# EAGLE board plus10_fromScratchOtherMill (EAGLE 9.0.1)
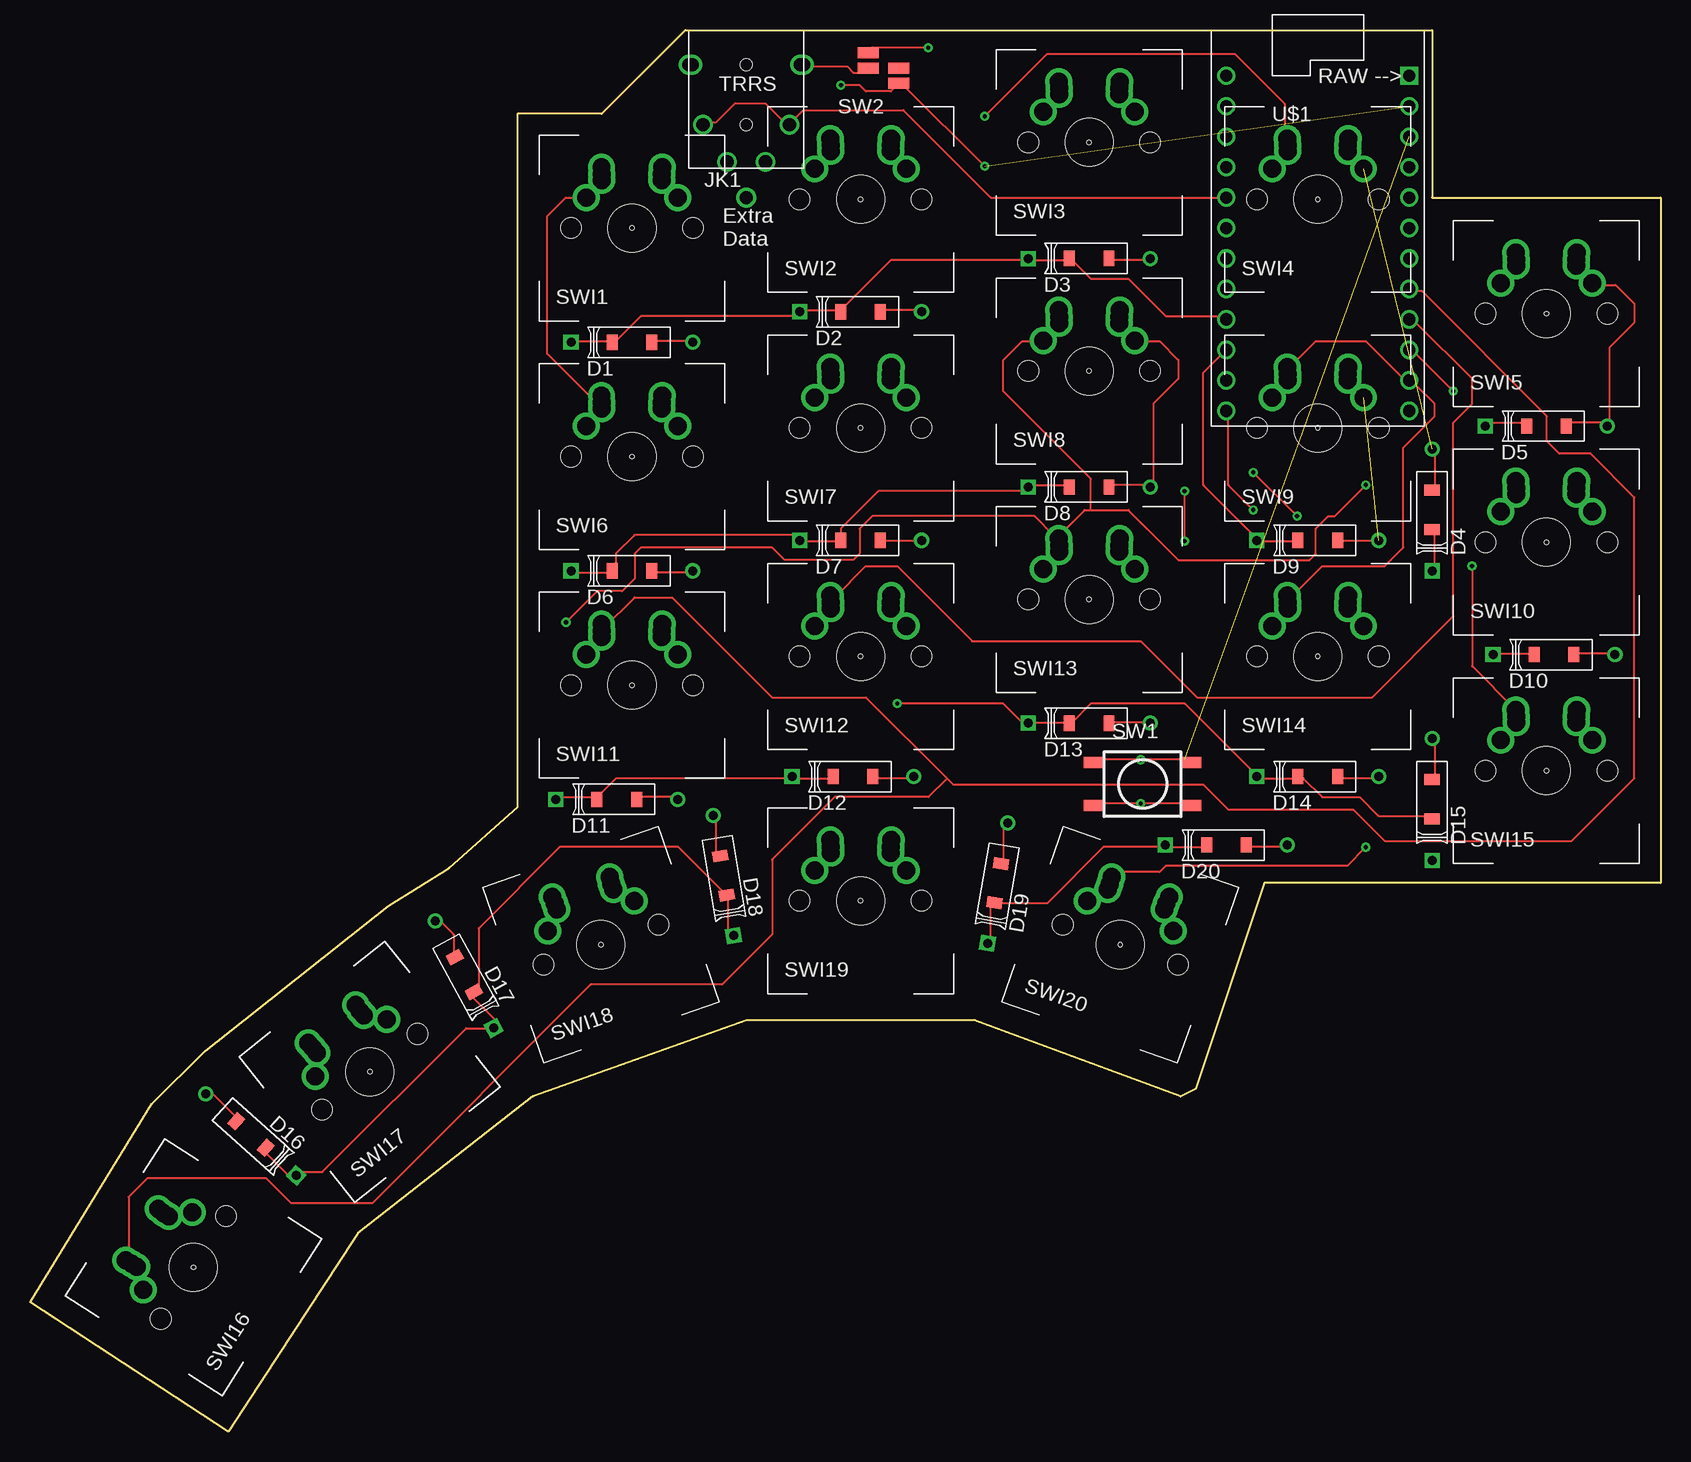
[diagram p0: board, top side]
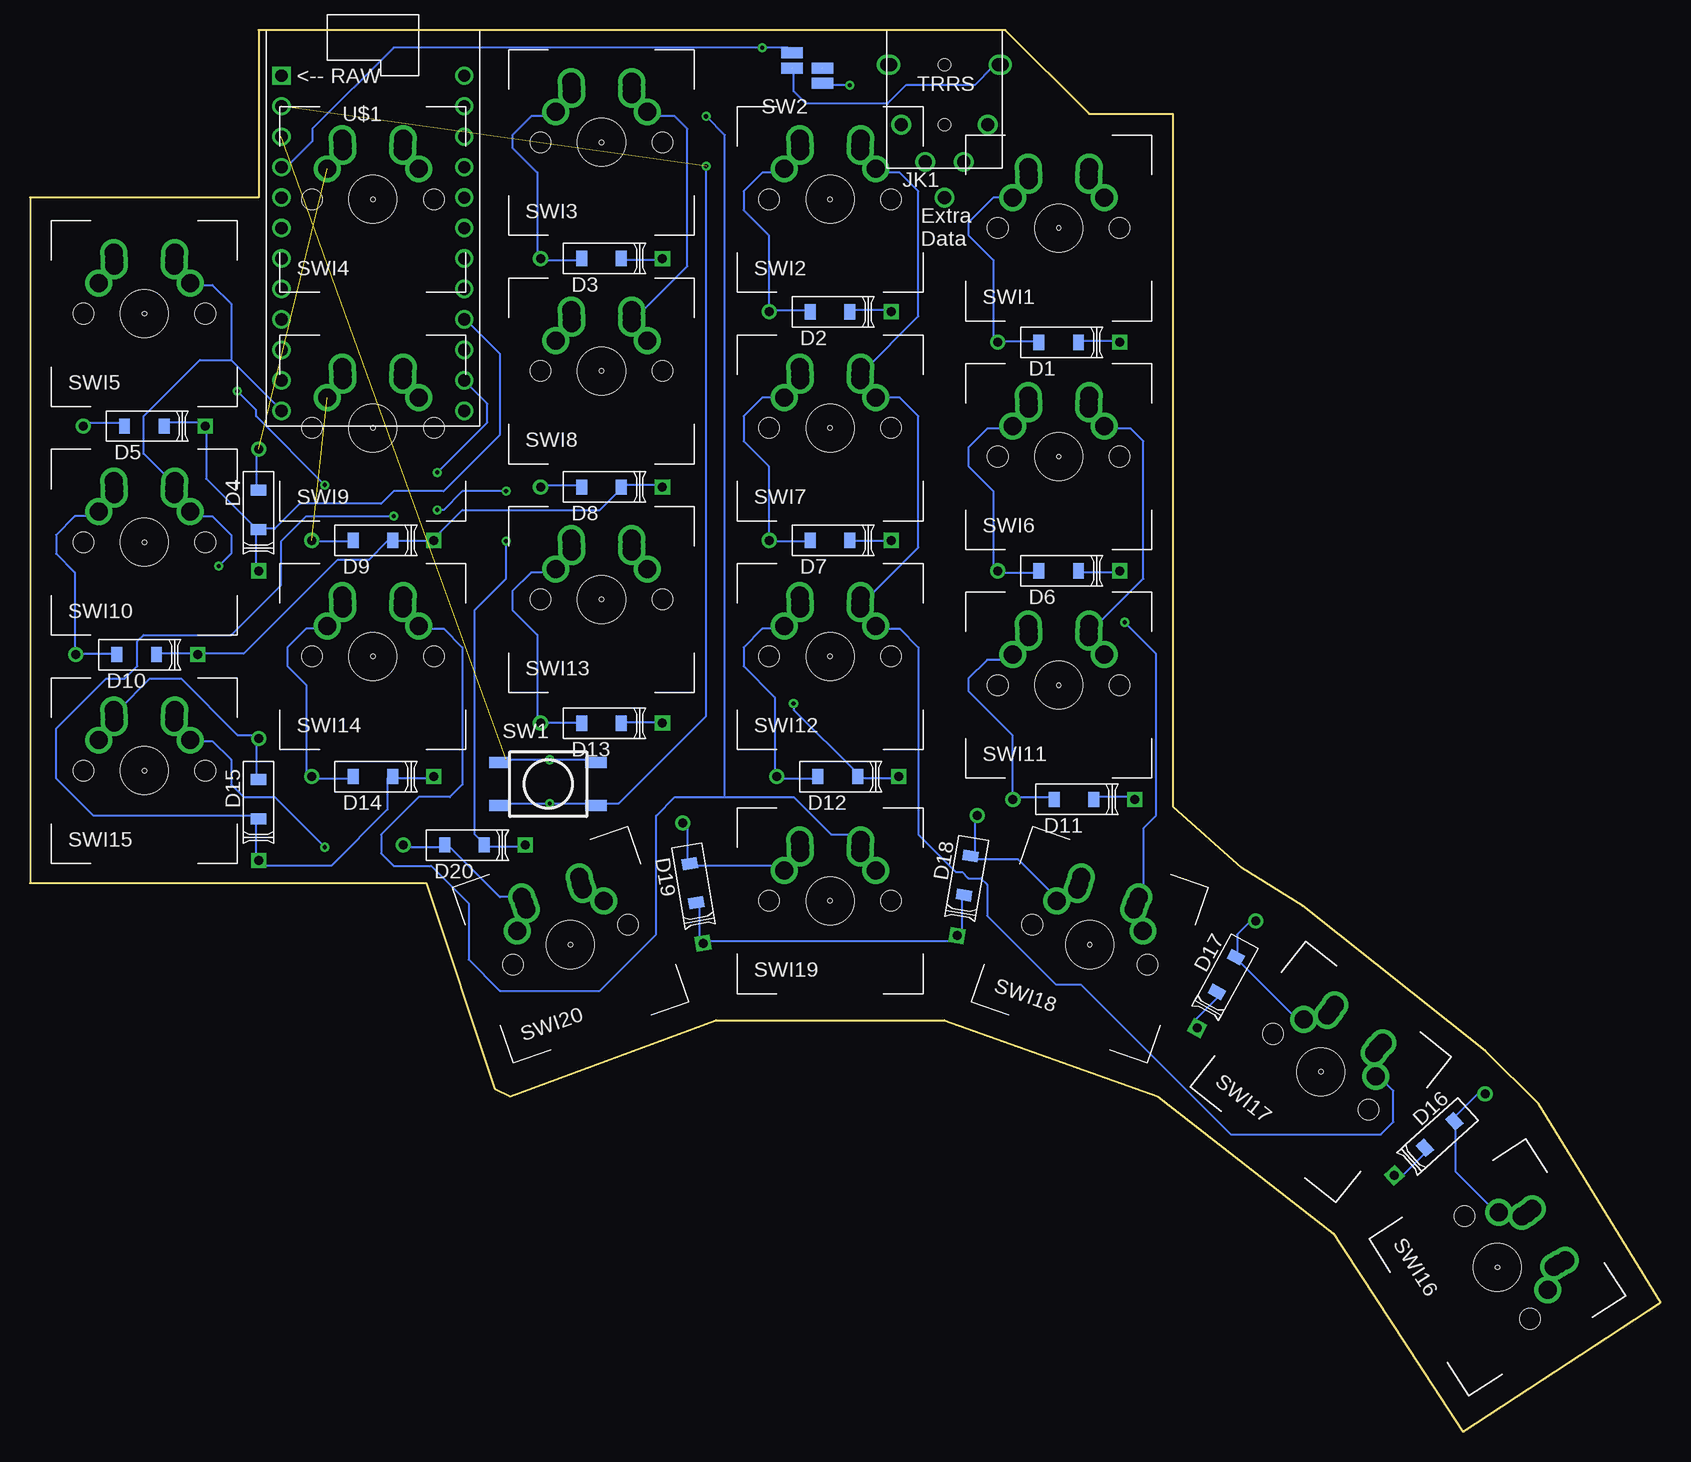
[diagram p1: board, bottom side, seen from below]

Size 135.89 x 116.84 mm. Coordinates in mm from the lower left corner, seen from the top.
Outline: 54.61,116.84 116.84,116.84 116.84,102.87 135.89,102.87 135.89,45.72 102.87,45.72 97.16,28.57 95.88,27.94 78.74,34.29 59.69,34.29 41.91,27.94 27.3,16.51 16.51,0 0,10.79 10.16,27.3 14.61,31.75 29.84,43.81 34.93,46.99 40.64,52.07 40.64,109.86 47.62,109.86 54.61,116.84
Copper layers (1*16): Top 0.035mm / dielectric 1.5mm / Bottom 0.035mm
Design rules "default *": minimum track width 6mil, minimum drill 0.35mm, track to track 35mil, track to pad 35mil, pad to pad 35mil, via to via 35mil, smd to smd 6mil, copper to edge 40mil, drill to drill 6mil, minimum pad ring 10mil, minimum via ring 8mil, stop-mask expansion 4mil, vias tented up to drill 0mil, thermal gap 10mil

## Footprints (pad centres in the part's own frame; a part is rotated, then mirrored left to right if it is on the bottom)
DIODE_COMBO = smd 0.914 x 1.27 bottom: ANOSB 1.651,0; CATSB -1.651,0 | smd 0.914 x 1.27: ANOST 1.651,0; CATST -1.651,0 | drill 0.75: ANOT 5.08,0 | drill 0.75 square: CATT -5.08,0
TRRSJACK = drill 1.1: 1B 4.5,-2.9; 1T 4.8,-2.9; 2B 3.6,-7.9; 2T -3.6,-7.9; 3B -1.6,-11; 3T 1.6,-11; 4B -4.8,-2.9; 4T -4.5,-2.9; EXTRA_DATA 0,-13.97 | hole 1: 0,-2.9; 0,-7.9
FLATSWT = smd 1.778 x 0.914: P$1 -4,-1.8; P$2 4,-1.8; P$3 -4,1.8; P$4 4,1.8 | smd 1.778 x 0.914 bottom: P$5 -4,-1.8; P$6 4,-1.8; P$7 -4,1.8; P$8 4,1.8
TRANSFER_PADS = smd 1.778 x 0.914 bottom: GNDB -1.27,-1.27; IN1B -1.27,0; IN4B 1.27,0; VCCB 1.27,1.27 | smd 1.778 x 0.914: GNDT 1.27,-1.27; IN1T -1.27,0; IN4T 1.27,0; VCCT -1.27,1.27
DOUBLED_MX/ALPS = drill 1.5: LAL -2.5,4; LAR -2.5,4.5; RAL 2.5,4; RAR 2.5,4.5 | drill 1.499: LCL -3.81,2.54; LCR -2.54,5.08; RCL 3.81,2.54; RCR 2.54,5.08 | hole 0.35: 0,0 | hole 3.988: 0,0 | hole 1.702: -5.08,0; 5.08,0
PROMICRO_UNDER = drill 1.016: P$1 -7.62,0; P$2 -7.62,-2.54; P$3 -7.62,-5.08; P$4 -7.62,-7.62; P$5 -7.62,-10.16; P$6 -7.62,-12.7; P$7 -7.62,-15.24; P$8 -7.62,-17.78; P$9 -7.62,-20.32; P$10 -7.62,-22.86; P$11 -7.62,-25.4; P$12 -7.62,-27.94; P$13 7.62,-27.94; P$14 7.62,-25.4; P$15 7.62,-22.86; P$16 7.62,-20.32; P$17 7.62,-17.78; P$18 7.62,-15.24; P$19 7.62,-12.7; P$20 7.62,-10.16; P$21 7.62,-7.62; P$22 7.62,-5.08; P$23 7.62,-2.54 | drill 1.016 square: P$24 7.62,0

## Placement (x,y rotation side)
D1  DIODE  [DIODE_COMBO]  50.16,90.81 0 top
D2  DIODE  [DIODE_COMBO]  69.21,93.34 0 top
D3  DIODE  [DIODE_COMBO]  88.27,97.79 0 top
D4  DIODE  [DIODE_COMBO]  116.84,76.84 90 top
D5  DIODE  [DIODE_COMBO]  126.36,83.82 0 top
D6  DIODE  [DIODE_COMBO]  50.16,71.76 0 top
D7  DIODE  [DIODE_COMBO]  69.21,74.3 0 top
D8  DIODE  [DIODE_COMBO]  88.27,78.74 0 top
D9  DIODE  [DIODE_COMBO]  107.31,74.3 0 top
D10  DIODE  [DIODE_COMBO]  127,64.77 0 top
D11  DIODE  [DIODE_COMBO]  48.9,52.7 0 top
D12  DIODE  [DIODE_COMBO]  68.58,54.61 0 top
D13  DIODE  [DIODE_COMBO]  88.27,59.05 0 top
D14  DIODE  [DIODE_COMBO]  107.31,54.61 0 top
D15  DIODE  [DIODE_COMBO]  116.84,52.7 90 top
D16  DIODE  [DIODE_COMBO]  18.41,24.77 138 top
D17  DIODE  [DIODE_COMBO]  36.2,38.1 118.7 top
D18  DIODE  [DIODE_COMBO]  57.79,46.35 99.6 top
D19  DIODE  [DIODE_COMBO]  80.64,45.72 80.4 top
D20  DIODE  [DIODE_COMBO]  99.69,48.89 0 top
JK1  TRRSJACK  [TRRSJACK]  59.69,116.84 0 top
SW1  RSTSWSMD  [FLATSWT]  92.71,53.97 0 top
SW2  TRANSFERPADDY  [TRANSFER_PADS]  71.12,113.67 0 top
SWI1  MX/ALPSDOUBLESIDED  [DOUBLED_MX/ALPS]  50.16,100.33 0 top
SWI2  MX/ALPSDOUBLESIDED  [DOUBLED_MX/ALPS]  69.21,102.72 0 top
SWI3  MX/ALPSDOUBLESIDED  [DOUBLED_MX/ALPS]  88.27,107.47 0 top
SWI4  MX/ALPSDOUBLESIDED  [DOUBLED_MX/ALPS]  107.31,102.72 0 top
SWI5  MX/ALPSDOUBLESIDED  [DOUBLED_MX/ALPS]  126.36,93.19 0 top
SWI6  MX/ALPSDOUBLESIDED  [DOUBLED_MX/ALPS]  50.16,81.28 0 top
SWI7  MX/ALPSDOUBLESIDED  [DOUBLED_MX/ALPS]  69.21,83.67 0 top
SWI8  MX/ALPSDOUBLESIDED  [DOUBLED_MX/ALPS]  88.27,88.42 0 top
SWI9  MX/ALPSDOUBLESIDED  [DOUBLED_MX/ALPS]  107.31,83.67 0 top
SWI10  MX/ALPSDOUBLESIDED  [DOUBLED_MX/ALPS]  126.36,74.14 0 top
SWI11  MX/ALPSDOUBLESIDED  [DOUBLED_MX/ALPS]  50.16,62.23 0 top
SWI12  MX/ALPSDOUBLESIDED  [DOUBLED_MX/ALPS]  69.21,64.62 0 top
SWI13  MX/ALPSDOUBLESIDED  [DOUBLED_MX/ALPS]  88.27,69.37 0 top
SWI14  MX/ALPSDOUBLESIDED  [DOUBLED_MX/ALPS]  107.31,64.62 0 top
SWI15  MX/ALPSDOUBLESIDED  [DOUBLED_MX/ALPS]  126.36,55.09 0 top
SWI16  MX/ALPSDOUBLESIDED  [DOUBLED_MX/ALPS]  13.61,13.69 57.6 top
SWI17  MX/ALPSDOUBLESIDED  [DOUBLED_MX/ALPS]  28.32,30 38.4 top
SWI18  MX/ALPSDOUBLESIDED  [DOUBLED_MX/ALPS]  47.57,40.59 19.2 top
SWI19  MX/ALPSDOUBLESIDED  [DOUBLED_MX/ALPS]  69.21,44.25 0 top
SWI20  MX/ALPSDOUBLESIDED  [DOUBLED_MX/ALPS]  90.86,40.59 340.8 top
U$1  PROMICROUNDER  [PROMICRO_UNDER]  107.31,113.03 0 top

## Library data of the parts
D1-D20 JK1 SW1 SW2 SWI1-SWI20 U$1 = Keys

## Nets
N$1: D1.ANOSB D1.ANOST D1.ANOT SWI1.RAL SWI1.RAR SWI1.RCL SWI1.RCR
N$2: SWI4.LAL SWI4.LAR SWI4.LCL SWI4.LCR SWI9.LAL SWI9.LAR SWI9.LCL SWI9.LCR SWI14.LAL SWI14.LAR SWI14.LCL SWI14.LCR SWI19.LAL SWI19.LAR SWI19.LCL SWI19.LCR U$1.P$14
N$3: SWI3.LAL SWI3.LAR SWI3.LCL SWI3.LCR SWI8.LAL SWI8.LAR SWI8.LCL SWI8.LCR SWI13.LAL SWI13.LAR SWI13.LCL SWI13.LCR SWI18.LAL SWI18.LAR SWI18.LCL SWI18.LCR U$1.P$15
N$4: SWI5.LAL SWI5.LAR SWI5.LCL SWI5.LCR SWI10.LAL SWI10.LAR SWI10.LCL SWI10.LCR SWI15.LAL SWI15.LAR SWI15.LCL SWI15.LCR SWI20.LAL SWI20.LAR SWI20.LCL SWI20.LCR U$1.P$13
N$5: D2.ANOSB D2.ANOST D2.ANOT SWI2.RAL SWI2.RAR SWI2.RCL SWI2.RCR
N$6: D3.ANOSB D3.ANOST D3.ANOT SWI3.RAL SWI3.RAR SWI3.RCL SWI3.RCR
N$7: D4.ANOSB D4.ANOST D4.ANOT SWI4.RAL SWI4.RAR SWI4.RCL SWI4.RCR
N$8: D5.ANOSB D5.ANOST D5.ANOT SWI5.RAL SWI5.RAR SWI5.RCL SWI5.RCR
N$9: D6.ANOSB D6.ANOST D6.ANOT SWI6.RAL SWI6.RAR SWI6.RCL SWI6.RCR
N$10: D7.ANOSB D7.ANOST D7.ANOT SWI7.RAL SWI7.RAR SWI7.RCL SWI7.RCR
N$11: D8.ANOSB D8.ANOST D8.ANOT SWI8.RAL SWI8.RAR SWI8.RCL SWI8.RCR
N$12: D9.ANOSB D9.ANOST D9.ANOT SWI9.RAL SWI9.RAR SWI9.RCL SWI9.RCR
N$13: D10.ANOSB D10.ANOST D10.ANOT SWI10.RAL SWI10.RAR SWI10.RCL SWI10.RCR
N$14: D11.ANOSB D11.ANOST D11.ANOT SWI11.RAL SWI11.RAR SWI11.RCL SWI11.RCR
N$15: D12.ANOSB D12.ANOST D12.ANOT SWI12.RAL SWI12.RAR SWI12.RCL SWI12.RCR
N$16: D13.ANOSB D13.ANOST D13.ANOT SWI13.RAL SWI13.RAR SWI13.RCL SWI13.RCR
N$17: D14.ANOSB D14.ANOST D14.ANOT SWI14.RAL SWI14.RAR SWI14.RCL SWI14.RCR
N$18: D15.ANOSB D15.ANOST D15.ANOT SWI15.RAL SWI15.RAR SWI15.RCL SWI15.RCR
N$19: D16.ANOSB D16.ANOST D16.ANOT SWI16.RAL SWI16.RAR SWI16.RCL SWI16.RCR
N$20: D17.ANOSB D17.ANOST D17.ANOT SWI17.RAL SWI17.RAR SWI17.RCL SWI17.RCR
N$21: D11.CATSB D11.CATST D11.CATT D12.CATSB D12.CATST D12.CATT D13.CATSB D13.CATST D13.CATT D14.CATSB D14.CATST D14.CATT D15.CATSB D15.CATST D15.CATT U$1.P$11
N$22: D6.CATSB D6.CATST D6.CATT D7.CATSB D7.CATST D7.CATT D8.CATSB D8.CATST D8.CATT D9.CATSB D9.CATST D9.CATT D10.CATSB D10.CATST D10.CATT U$1.P$10
N$23: D18.ANOSB D18.ANOST D18.ANOT SWI18.RAL SWI18.RAR SWI18.RCL SWI18.RCR
N$24: D16.CATSB D16.CATST D16.CATT D17.CATSB D17.CATST D17.CATT D18.CATSB D18.CATST D18.CATT D19.CATSB D19.CATST D19.CATT D20.CATSB D20.CATST D20.CATT U$1.P$12
N$25: SWI1.LAL SWI1.LAR SWI1.LCL SWI1.LCR SWI6.LAL SWI6.LAR SWI6.LCL SWI6.LCR SWI11.LAL SWI11.LAR SWI11.LCL SWI11.LCR SWI16.LAL SWI16.LAR SWI16.LCL SWI16.LCR U$1.P$17
N$26: SWI2.LAL SWI2.LAR SWI2.LCL SWI2.LCR SWI7.LAL SWI7.LAR SWI7.LCL SWI7.LCR SWI12.LAL SWI12.LAR SWI12.LCL SWI12.LCR SWI17.LAL SWI17.LAR SWI17.LCL SWI17.LCR U$1.P$16
N$30: JK1.1B JK1.1T SW2.IN1B SW2.IN1T
N$31: JK1.4B JK1.4T SW2.IN4B SW2.IN4T
N$32: JK1.2B JK1.2T U$1.P$5
N$33: D1.CATSB D1.CATST D1.CATT D2.CATSB D2.CATST D2.CATT D3.CATSB D3.CATST D3.CATT D4.CATSB D4.CATST D4.CATT D5.CATSB D5.CATST D5.CATT U$1.P$9
N$34: D19.ANOSB D19.ANOST D19.ANOT SWI19.RAL SWI19.RAR SWI19.RCL SWI19.RCR
N$35: D20.ANOSB D20.ANOST D20.ANOT SWI20.RAL SWI20.RAR SWI20.RCL SWI20.RCR
N$41: SW2.VCCB SW2.VCCT U$1.P$21
N$42: SW1.P$1 SW1.P$2 SW1.P$5 SW1.P$6 SW2.GNDB SW2.GNDT U$1.P$23
N$43: SW1.P$3 SW1.P$4 SW1.P$7 SW1.P$8 U$1.P$22

## Tracks (layer width: path | path; a pad name or v marks a point on that pad's centre or on a via)
N$1
  Top 0.152: D1.ANOST 51.96,90.89 55.08,90.89 D1.ANOT
  Bottom 0.152: D1.ANOST 51.96,90.89 55.08,90.89 D1.ANOT 55.6,90.89 55.6,97.66 57.68,99.75 57.68,100.79 55.6,102.87 SWI1.RCL
N$2  (via drill 0.35)
  Top 0.152: SWI9.LCL 104.55,87.25 SWI9.LAR 105.07,88.29 SWI9.LAL 105.07,87.77 SWI9.LCR 105.07,88.81 107.15,90.89 111.32,90.89 114.44,87.77 U$1.P$14 114.96,87.25 115.48,87.25 117.04,85.69 117.04,84.65 114.44,82.04 114.44,73.71 112.88,72.15 107.67,72.15 105.07,69.55 | 104.55,106.52 103.5,105.47 SWI4.LCL | 104.55,106.52 SWI4.LAL | 104.55,106.52 SWI4.LAR 105.07,107.56 SWI4.LCR 104.55,108.08 104.55,110.68 100.38,114.85 84.76,114.85 v79.55,109.64 | 66.53,48.2 65.49,47.15 SWI19.LCL | SWI19.LCR 67.06,49.24 SWI19.LAR 66.53,48.2 | 66.53,48.2 SWI19.LAL | SWI14.LCL 103.5,67.46 104.55,68.5 SWI14.LAL 105.07,69.55 | 105.07,69.55 SWI14.LCR 105.07,69.02 SWI14.LAR 105.07,69.55
  Bottom 0.152: 77.99,52.88 82.16,52.88 83.72,51.32 83.72,41.43 88.41,36.74 96.74,36.74 99.34,39.34 99.34,44.03 102.46,47.15 105.59,47.15 106.63,48.2 106.63,49.76 103.5,52.88 100.9,52.88 99.86,53.92 99.86,65.38 101.42,66.94 103.5,66.94 SWI14.LCL | 77.99,52.88 72.26,52.88 69.14,49.76 67.06,49.76 SWI19.LCR | v79.55,109.64 77.99,108.08 77.99,52.88
N$3  (via drill 0.35)
  Top 0.152: SWI3.LCL 84.76,110.16 85.8,111.2 SWI3.LAR 85.8,112.24 SWI3.LCR 85.8,111.72 SWI3.LAL | SWI8.LAL 85.8,92.46 SWI8.LCR 85.8,93.5 85.8,92.98 SWI8.LAR 85.28,91.94 84.76,91.42 SWI8.LCL 84.24,90.89 82.68,90.89 81.11,89.33 81.11,86.73 88.41,79.44 88.41,76.84 | SWI18.LCL 43.62,41.95 43.62,43.51 SWI18.LAR | SWI18.LCR 43.62,44.03 SWI18.LAR | SWI18.LAL 44.15,43.51 SWI18.LAR | v118.6,86.73 115.48,89.85 114.96,89.85 U$1.P$15 | v111.32,78.92 108.71,76.31 108.19,76.31 107.15,75.27 107.15,73.19 106.63,72.67 95.69,72.67 91.53,76.84 88.41,76.84 | 88.41,76.84 87.88,76.84 85.8,74.75 | 85.8,73.19 84.76,72.15 SWI13.LCL | 85.8,74.75 SWI13.LCR 85.28,74.75 83.72,76.31 70.18,76.31 69.14,75.27 69.14,73.19 68.62,72.67 62.89,72.67 61.85,73.71 50.91,73.71 50.39,73.19 50.39,71.11 49.35,70.07 47.27,70.07 v44.67,67.46 | 85.8,74.75 SWI13.LAR 85.8,73.19 | 85.8,73.19 SWI13.LAL
  Bottom 0.152: v118.6,86.73 117.04,85.17 117.04,84.65 v111.32,78.92 | v44.67,67.46 42.06,64.86 42.06,51.32 43.1,50.28 43.1,44.55 SWI18.LCR | SWI3.LCL 84.24,109.64 82.16,109.64 81.11,108.6 81.11,97.14 85.28,92.98 SWI8.LAL
N$4  (via drill 0.35)
  Top 0.152: SWI5.LAR 123.81,98.18 SWI5.LCR 123.81,97.66 SWI5.LAL 123.81,97.14 122.77,96.1 SWI5.LCL | SWI20.LCL 88.41,44.55 89.45,45.59 SWI20.LAL 90.49,46.11 SWI20.LCR 89.97,45.59 SWI20.LAR 90.49,46.63 94.13,46.63 94.65,47.15 109.75,47.15 v111.32,48.72 | 123.81,59.13 122.77,58.09 SWI15.LCL | 123.81,59.13 SWI15.LAR 123.81,59.65 123.81,60.17 | 123.81,60.17 SWI15.LCR 123.81,59.13 | 123.81,59.13 SWI15.LAL 123.81,60.17 | SWI10.LCL 122.77,76.84 123.81,77.88 SWI10.LAR 123.81,78.92 SWI10.LCR 123.81,78.4 SWI10.LAL | 123.81,60.17 120.17,63.82 v120.17,72.15
  Bottom 0.152: 119.13,89.33 114.96,85.17 U$1.P$13 | 119.13,89.33 119.13,94.02 120.69,95.58 122.25,95.58 SWI5.LCL | v120.17,72.15 119.13,73.19 119.13,74.75 120.69,76.31 122.25,76.31 SWI10.LCL | v111.32,48.72 115.48,52.88 118.08,52.88 119.13,53.92 119.13,56.01 120.69,57.57 122.25,57.57 SWI15.LCL | 119.13,89.33 121.73,89.33 126.42,84.65 126.42,81.52 124.33,79.44 SWI10.LCR
N$5
  Top 0.152: D2.ANOST 71.22,93.5 73.82,93.5 D2.ANOT
  Bottom 0.152: D2.ANOST 71.22,93.5 73.82,93.5 D2.ANOT 74.35,93.5 74.35,99.75 76.43,101.83 76.43,103.39 74.87,104.95 73.3,104.95 SWI2.RCL
N$6
  Top 0.152: D3.ANOST 89.97,97.66 93.09,97.66 D3.ANOT
  Bottom 0.152: D3.ANOST 89.97,97.66 93.09,97.66 D3.ANOT 93.61,98.18 93.61,104.95 95.69,107.04 95.69,108.08 94.13,109.64 92.57,109.64 SWI3.RCL
N$7  (1 unrouted)
  Top 0.152: D4.ANOST 117.04,78.92 117.04,81.52 D4.ANOT
  Bottom 0.152: D4.ANOST 117.04,78.92 117.04,81.52 D4.ANOT
N$8
  Top 0.152: D5.ANOST 127.98,84.12 131.1,84.12 D5.ANOT 131.62,84.12 131.62,90.37 133.71,92.46 133.71,94.02 132.14,95.58 130.58,95.58 SWI5.RCL
  Bottom 0.152: D5.ANOST 127.98,84.12 131.1,84.12 D5.ANOT
N$9
  Top 0.152: D6.ANOST 51.96,71.63 55.08,71.63 D6.ANOT
  Bottom 0.152: D6.ANOST 51.96,71.63 55.08,71.63 D6.ANOT 55.6,72.15 55.6,78.4 57.68,80.48 57.68,82.04 56.12,83.6 54.04,83.6 SWI6.RCL
N$10
  Top 0.152: D7.ANOST 71.22,74.23 73.82,74.23 D7.ANOT
  Bottom 0.152: D7.ANOST 71.22,74.23 73.82,74.23 D7.ANOT 74.35,74.75 74.35,80.48 76.43,82.56 76.43,84.65 74.87,86.21 SWI7.RCL
N$11
  Top 0.152: D8.ANOST 89.97,78.92 93.09,78.92 D8.ANOT 93.61,78.92 93.61,85.69 95.69,87.77 95.69,89.33 94.13,90.89 92.57,90.89 SWI8.RCL
  Bottom 0.152: D8.ANOST 89.97,78.92 93.09,78.92 D8.ANOT
N$12  (1 unrouted)
  Top 0.152: D9.ANOST 109.23,74.23 112.36,74.23 D9.ANOT
  Bottom 0.152: D9.ANOST 109.23,74.23 112.36,74.23 D9.ANOT
N$13
  Top 0.152: D10.ANOST 129.02,64.86 131.62,64.86 D10.ANOT
  Bottom 0.152: D10.ANOST 129.02,64.86 131.62,64.86 D10.ANOT 132.14,64.86 132.14,71.63 133.71,73.19 133.71,74.75 132.14,76.31 130.58,76.31 SWI10.RCL
N$14
  Top 0.152: D11.ANOST 50.91,52.88 53.52,52.88 D11.ANOT
  Bottom 0.152: D11.ANOST 50.91,52.88 53.52,52.88 D11.ANOT 54.04,52.88 54.04,58.09 57.68,61.73 57.68,62.78 56.12,64.34 54.04,64.34 SWI11.RCL
N$15
  Top 0.152: D12.ANOST 70.18,54.45 73.3,54.45 D12.ANOT
  Bottom 0.152: D12.ANOST 70.18,54.45 73.3,54.45 D12.ANOT 73.82,54.97 73.82,61.21 76.43,63.82 76.43,65.38 74.87,66.94 73.3,66.94 SWI12.RCL
N$16
  Top 0.152: D13.ANOST 89.97,59.13 93.09,59.13 D13.ANOT
  Bottom 0.152: D13.ANOST 89.97,59.13 93.09,59.13 D13.ANOT 93.61,59.13 93.61,66.42 95.69,68.5 95.69,70.07 94.13,71.63 92.57,71.63 SWI13.RCL
N$17
  Top 0.152: D14.ANOST 109.23,54.45 112.36,54.45 D14.ANOT
  Bottom 0.152: D14.ANOST 109.23,54.45 112.36,54.45 D14.ANOT 112.88,54.97 112.88,62.25 114.44,63.82 114.44,65.38 112.88,66.94 111.32,66.94 SWI14.RCL
N$18
  Top 0.152: D15.ANOST 117.04,54.45 117.04,57.57 D15.ANOT
  Bottom 0.152: D15.ANOST 117.04,54.45 117.04,57.57 D15.ANOT 117.04,58.09 118.6,58.09 123.29,62.78 125.89,62.78 128.5,60.17 SWI15.RAL
N$19
  Top 0.152: D16.ANOST 17.07,26.33 14.99,28.41 D16.ANOT
  Bottom 0.152: D16.ANOT 14.99,28.41 17.07,26.33 D16.ANOST 17.07,25.81 17.07,21.64 13.95,18.52 SWI16.RCL
N$20
  Top 0.152: D17.ANOST 35.29,39.86 35.29,41.43 34.25,42.47 D17.ANOT
  Bottom 0.152: D17.ANOT 34.25,42.47 35.29,41.43 35.29,39.86 D17.ANOST 35.29,39.34 30.09,34.14 SWI17.RCL
N$21  (via drill 0.35)
  Top 0.152: v105.59,76.31 v101.94,79.96 | 47.27,52.88 44.15,52.88 D11.CATT | D12.CATSB 66.53,54.45 63.93,54.45 D12.CATT 63.41,54.45 48.83,54.45 47.27,52.88 | 47.27,52.88 D11.CATSB | D15.CATSB 116.52,51.32 112.36,51.32 110.8,52.88 107.67,52.88 106.11,54.45 D14.CATSB 105.59,54.45 102.46,54.45 D14.CATT 101.94,54.97 96.21,60.69 88.41,60.69 86.84,59.13 D13.CATSB 86.32,59.13 83.2,59.13 D13.CATT 82.68,59.13 81.11,60.69 v72.26,60.69
  Bottom 0.152: v101.94,79.96 97.78,84.12 97.78,85.69 99.34,87.25 U$1.P$11 | v105.59,76.31 112.88,76.31 114.96,74.23 114.96,70.59 119.13,66.42 126.42,66.42 126.94,65.9 126.94,63.82 127.98,62.78 129.54,62.78 133.71,58.61 133.71,54.45 130.58,51.32 117.04,51.32 D15.CATSB 117.04,50.8 117.04,47.68 D15.CATT 116.52,47.15 110.8,47.15 106.11,51.84 106.11,54.45 D14.CATSB 105.59,54.45 102.46,54.45 D14.CATT | D11.CATSB 47.27,52.88 44.15,52.88 D11.CATT | D12.CATT 63.93,54.45 66.53,54.45 D12.CATSB 67.06,54.97 72.26,60.17 v72.26,60.69 | D13.CATSB 86.32,59.13 83.2,59.13 D13.CATT
N$22
  Top 0.152: D6.CATT 45.19,71.63 48.31,71.63 D6.CATSB 48.83,72.15 48.83,73.19 50.39,74.75 63.93,74.75 D7.CATT 64.45,74.23 67.58,74.23 D7.CATSB 67.58,74.75 67.58,75.27 70.7,78.4 82.68,78.4 D8.CATT 83.2,78.92 86.32,78.92 D8.CATSB | D10.CATSB 125.37,64.86 122.25,64.86 D10.CATT | D9.CATSB 105.59,74.23 102.46,74.23 D9.CATT 101.94,74.75 97.78,78.92 97.78,88.29 99.34,89.85 U$1.P$10
  Bottom 0.152: D6.CATSB 48.31,71.63 45.19,71.63 D6.CATT | D7.CATSB 67.58,74.23 64.45,74.23 D7.CATT | D8.CATT 83.2,78.92 86.32,78.92 D8.CATSB 86.84,78.4 88.41,76.84 99.86,76.84 101.94,74.75 D9.CATT 102.46,74.23 105.59,74.23 D9.CATSB 106.11,74.23 107.67,72.67 110.27,72.67 118.08,64.86 121.73,64.86 D10.CATT 122.25,64.86 125.37,64.86 D10.CATSB
N$23
  Top 0.152: D18.ANOST 57.16,48.2 57.16,51.32 D18.ANOT
  Bottom 0.152: D18.ANOT 57.16,51.32 57.16,48.2 D18.ANOST 57.16,47.68 53.52,47.68 50.39,44.55 SWI18.RCL
N$24  (via drill 0.35)
  Top 0.152: D16.CATSB 19.67,23.2 21.75,21.12 D16.CATT 22.28,21.64 24.36,21.64 36.34,33.62 38.42,33.62 D17.CATT 38.94,34.14 36.86,36.22 D17.CATSB 37.38,36.74 37.38,41.95 44.15,48.72 54.04,48.72 57.68,45.07 D18.CATSB 58.2,44.55 58.2,41.43 D18.CATT | D19.CATT 80.07,40.91 80.07,44.03 D19.CATSB 80.59,44.03 84.76,44.03 89.45,48.72 94.13,48.72 D20.CATT 94.65,48.72 97.78,48.72 D20.CATSB | v101.94,76.84 99.86,78.92 99.86,84.65 U$1.P$12 | v96.21,74.23 v96.21,78.4
  Bottom 0.152: D17.CATSB 36.86,36.22 38.94,34.14 D17.CATT | D16.CATSB 19.67,23.2 21.75,21.12 D16.CATT | D18.CATSB 58.2,44.55 58.2,41.43 D18.CATT 58.73,40.91 79.55,40.91 D19.CATT 80.07,40.91 80.07,44.03 D19.CATSB | D20.CATT 94.65,48.72 97.78,48.72 D20.CATSB 98.3,49.24 98.82,49.76 98.82,68.5 96.21,71.11 v96.21,74.23 | v101.94,76.84 101.42,76.84 99.86,78.4 v96.21,78.4
N$25
  Top 0.152: 8.22,14.35 SWI16.LAL 9.26,13.31 9.26,12.27 SWI16.LCL | 8.22,14.35 SWI16.LCR | SWI1.LAL 47.79,104.43 SWI1.LCR 47.79,104.95 SWI1.LAR 47.79,103.91 46.75,102.87 SWI1.LCL 44.67,102.87 43.1,101.31 43.1,89.85 47.27,85.69 SWI6.LAL 47.79,85.17 | 47.79,85.17 46.75,84.12 SWI6.LCL | SWI6.LCR 47.79,86.21 SWI6.LAR 47.79,85.17 | 47.79,66.94 SWI11.LAR | 76.43,54.45 69.66,61.21 61.85,61.21 53.52,69.55 50.39,69.55 47.79,66.94 | 76.43,54.45 76.95,53.92 97.78,53.92 99.86,51.84 110.27,51.84 112.88,49.24 128.5,49.24 133.71,54.45 133.71,77.88 130.06,81.52 127.46,81.52 126.42,82.56 126.42,84.65 116,95.06 114.96,95.06 U$1.P$17 | SWI11.LCL 46.75,64.86 47.79,65.9 SWI11.LAL 47.79,66.94 | 47.79,66.94 SWI11.LCR | 8.22,14.35 8.22,19.56 9.78,21.12 19.67,21.12 21.75,19.04 28.52,19.04 46.75,37.26 57.68,37.26 61.85,41.43 61.85,47.68 67.06,52.88 74.87,52.88 76.43,54.45 | 8.22,14.35 SWI16.LAR
  Bottom 0.152: SWI6.LCL 46.23,83.6 44.15,83.6 43.1,82.56 43.1,71.11 47.27,66.94 SWI11.LCR
N$26
  Top 0.152: 66.53,106.52 65.49,105.47 SWI2.LCL | SWI2.LCR 67.06,107.56 SWI2.LAR 66.53,106.52 | 66.53,106.52 SWI2.LAL | SWI7.LCL 65.49,86.21 66.53,87.25 SWI7.LAR 67.06,88.29 SWI7.LCR 67.06,87.77 SWI7.LAL | SWI17.LCL 23.84,29.97 23.84,31.53 SWI17.LAL 23.32,32.05 SWI17.LCR 23.84,32.05 SWI17.LAR | 67.06,69.55 69.66,72.15 72.26,72.15 78.51,65.9 92.57,65.9 97.26,61.21 111.84,61.21 118.6,67.98 118.6,84.12 120.17,85.69 120.17,87.77 115.48,92.46 114.96,92.46 U$1.P$16 | SWI12.LCL 65.49,67.46 66.53,68.5 SWI12.LAL 67.06,69.55 | 67.06,69.55 SWI12.LCR 67.06,69.02 SWI12.LAR
  Bottom 0.152: SWI17.LCL 23.32,29.45 22.28,28.41 22.28,25.81 23.32,24.77 35.81,24.77 48.31,37.26 50.39,37.26 56.12,42.99 56.12,45.59 56.64,46.11 57.68,46.11 58.2,46.63 58.73,46.63 61.85,49.76 61.85,65.38 63.41,66.94 64.97,66.94 SWI12.LCL | SWI7.LCL 63.41,86.21 61.85,84.65 61.85,73.71 66.53,69.02 SWI12.LAR | SWI2.LCL 64.97,104.95 63.41,104.95 61.85,103.39 61.85,92.98 66.53,88.29 SWI7.LAL
N$30  (1 unrouted)
  Top 0.152: SW2.IN1T 69.66,113.28 68.62,113.28 68.1,113.81 64.97,113.81 JK1.1T 64.45,114.33 JK1.1B
N$31  (1 unrouted)
  Top 0.152: JK1.4B 55.08,114.33 JK1.4T
  Bottom 0.152: SW2.IN4T 72.26,113.28 72.26,111.72 71.22,110.68 64.45,110.68 62.89,112.24 57.16,112.24 55.6,113.81 JK1.4T
N$32
  Top 0.152: U$1.P$5 80.07,102.87 72.78,110.16 64.45,110.16 63.41,109.12 JK1.2B 62.89,109.12 61.33,110.68 58.73,110.68 57.16,109.12 56.12,109.12 JK1.2T
N$33
  Top 0.152: D1.CATT 45.19,90.89 48.31,90.89 D1.CATSB 48.83,90.89 50.91,92.98 63.93,92.98 D2.CATT 64.45,93.5 67.58,93.5 | D4.CATSB 117.04,74.75 117.04,72.15 D4.CATT | D5.CATSB 124.33,84.12 121.73,84.12 D5.CATT | U$1.P$9 99.34,92.98 94.65,92.98 91.53,96.1 88.41,96.1 86.84,97.66 D3.CATSB 86.32,97.66 83.2,97.66 D3.CATT 82.68,97.66 71.74,97.66 67.58,93.5 | 67.58,93.5 D2.CATSB
  Bottom 0.152: D1.CATSB 48.31,90.89 45.19,90.89 D1.CATT | D2.CATSB 67.58,93.5 64.45,93.5 D2.CATT | D4.CATSB 117.04,74.75 117.04,72.15 D4.CATT | D5.CATSB 124.33,84.12 121.73,84.12 D5.CATT 121.21,83.6 121.21,79.44 117.04,75.27 D4.CATSB | D3.CATSB 86.32,97.66 83.2,97.66 D3.CATT | D4.CATSB 116.52,75.27 115.48,75.27 113.4,77.36 106.63,77.36 105.59,78.4 101.42,78.4 96.74,83.08 96.74,89.85 99.34,92.46 U$1.P$9
N$34
  Top 0.152: D19.ANOST 81.11,47.68 81.11,50.28 D19.ANOT
  Bottom 0.152: D19.ANOT 81.11,50.28 81.11,47.68 D19.ANOST 80.59,47.15 73.3,47.15 SWI19.RCL
N$35
  Top 0.152: D20.ANOST 101.42,48.72 104.55,48.72 D20.ANOT
  Bottom 0.152: D20.ANOT 104.55,48.72 101.42,48.72 D20.ANOST 100.9,48.72 96.74,44.55 95.17,44.55 SWI20.RAR
N$41  (via drill 0.35)
  Top 0.152: v74.87,115.37 70.18,115.37 SW2.VCCT
  Bottom 0.152: SW2.VCCB 72.78,115.37 v74.87,115.37 105.59,115.37 112.36,108.6 112.36,107.56 114.44,105.47 U$1.P$21
N$42  (via drill 0.35)  (1 unrouted)
  Top 0.152: SW1.P$5 88.92,52.36 v92.57,52.36 96.21,52.36 SW1.P$6 | v67.58,112.24 69.14,112.24 69.66,111.72 71.74,111.72 72.26,112.24 SW2.GNDT 72.78,112.24 v79.55,105.47
  Bottom 0.152: v67.58,112.24 69.66,112.24 SW2.GNDB | SW1.P$6 96.21,52.36 v92.57,52.36 88.92,52.36 SW1.P$5 88.41,52.36 86.84,52.36 79.55,59.65 v79.55,105.47
N$43  (via drill 0.35)  (1 unrouted)
  Top 0.152: SW1.P$7 88.92,56.01 v92.57,56.01 96.21,56.01 SW1.P$8
  Bottom 0.152: SW1.P$7 88.92,56.01 v92.57,56.01 96.21,56.01 SW1.P$8